# EAGLE board TPS6113X (EAGLE 6.3)
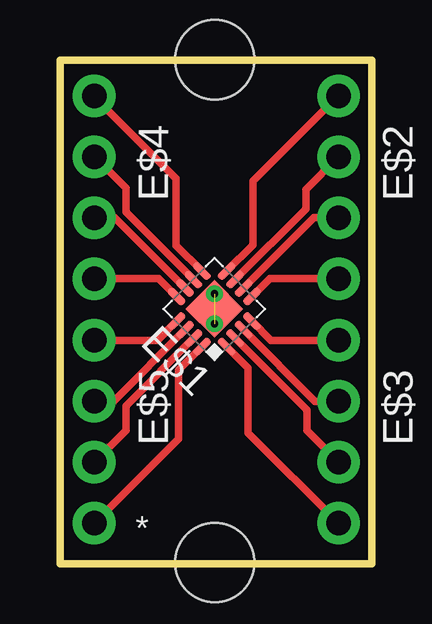
[diagram p0: board, top side]
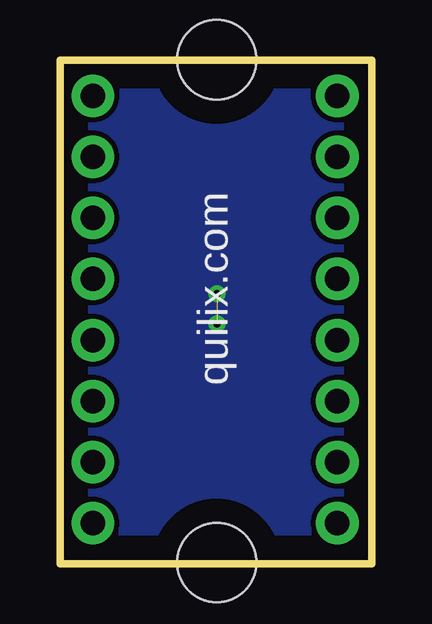
[diagram p1: board, bottom side, seen from below]

Size 13 x 21 mm. Coordinates in mm from the lower left corner, seen from the top.
Outline: 0,21 0,0 13,0 13,21 0,21
Copper layers (1*16): Top 0.035mm / dielectric 1.5mm / Bottom 0.035mm
Design rules "default": minimum track width 10mil, minimum drill 24mil, track to track 8mil, track to pad 8mil, pad to pad 8mil, via to via 8mil, smd to smd 8mil, copper to edge 40mil, drill to drill 8mil, minimum pad ring 10mil, minimum via ring 8mil, stop-mask expansion 4mil, vias tented up to drill 0mil, thermal gap 10mil

## Footprints (pad centres in the part's own frame; a part is rotated, then mirrored left to right if it is on the bottom)
QFN16 = smd 0.85 x 0.3: 1 -1.475,0.75; 2 -1.475,0.25; 3 -1.475,-0.25; 4 -1.475,-0.75; 9 1.475,-0.75; 10 1.475,-0.25; 11 1.475,0.25; 12 1.475,0.75 | smd 0.3 x 0.85: 5 -0.75,-1.475; 6 -0.25,-1.475; 7 0.25,-1.475; 8 0.75,-1.475; 13 0.75,1.475; 14 0.25,1.475; 15 -0.25,1.475; 16 -0.75,1.475 | smd 1.7 x 1.7: TH 0,0
1X04-CLEANBIG = drill 1.016 pad 1.778: 1 -3.81,0; 2 -1.27,0; 3 1.27,0; 4 3.81,0
STAND-OFF = hole 3.302: 0,0

## Placement (x,y rotation side)
E$1  [QFN16]  6.44,10.62 135 top
E$2  [1X04-CLEANBIG]  11.63,15.69 270 top
E$3  [1X04-CLEANBIG]  11.63,5.5 270 top
E$4  [1X04-CLEANBIG]  1.43,15.69 270 top
E$5  [1X04-CLEANBIG]  1.43,5.5 270 top
JP3  STAND-OFF  [STAND-OFF]  6.46,0.04 270 top
JP4  STAND-OFF  [STAND-OFF]  6.46,21.01 270 top

## Library data of the parts
E$1 = texas
E$2-E$5 = adafruit
JP3 JP4 = SparkFun

## Nets
S$1: E$1.9 E$4.1
S$2: E$1.10 E$4.2
S$3: E$1.11 E$4.3
S$4: E$1.12 E$4.4
S$5: E$1.13 E$5.1
S$6: E$1.14 E$5.2
S$7: E$1.15 E$5.3
S$8: E$1.16 E$5.4
S$9: E$1.1 E$3.4
S$10: E$1.2 E$3.3
S$11: E$1.3 E$3.2
S$12: E$1.4 E$3.1
S$13: E$1.5 E$2.4
S$14: E$1.6 E$2.3
S$15: E$1.7 E$2.2
S$16: E$1.8 E$2.1

## Tracks (layer width: path | path; a pad name or v marks a point on that pad's centre or on a via)
PPAD  (via drill 0.3)  (1 unrouted)
  other vias: 6.45,11.25 6.45,10
  pour Bottom: 0.55,0.4 12.6,0.4 12.6,20.65 0.4,20.65 0.4,0.45
S$1
  Top 0.305: E$1.9 4.85,13.27 4.85,16.05 1.43,19.47 E$4.1
S$2
  Top 0.305: E$1.10 2.75,14.66 2.75,15.65 E$4.2
S$3
  Top 0.305: E$1.11 2.29,14.42 E$4.3
S$4
  Top 0.305: E$1.12 4.12,11.88 E$4.4
S$5
  Top 0.305: E$1.13 4.07,9.31 E$5.1
S$6
  Top 0.305: E$1.14 2.24,6.77 E$5.2
S$7
  Top 0.305: E$1.15 2.75,6.58 2.75,5.55 E$5.3
S$8
  Top 0.305: E$1.16 4.95,8.07 4.95,5.2 E$5.4
S$9
  Top 0.305: E$1.1 7.85,8.15 7.85,5.45 11.61,1.69 E$3.4
S$10
  Top 0.305: E$1.2 10.3,6.41 10.3,5.55 E$3.3
S$11
  Top 0.305: E$1.3 10.64,6.77 E$3.2
S$12
  Top 0.305: E$1.4 8.81,9.31 E$3.1
S$13
  Top 0.305: E$1.5 8.76,11.88 E$2.4
S$14
  Top 0.305: E$1.6 10.59,14.42 E$2.3
S$15
  Top 0.305: E$1.7 10.25,14.78 10.25,15.6 11.61,16.96 E$2.2
S$16
  Top 0.305: E$1.8 8.05,13.29 8.05,15.95 11.6,19.5 E$2.1

## Text on the board
tSilk: *
_bsilk: quilix.com